# Altium PCB TPSM84824_PCB.PcbDoc
Units mm, origin at the board's own origin, x right, y up, seen from the top; angles counter-clockwise.
Board outline 22.2 x 28.4 mm, 2 copper layers (Top Layer, Bottom Layer); 11 components, 7 nets, 40 pads, 0 vias.
Unrouted connection lines stored in the file: 1.
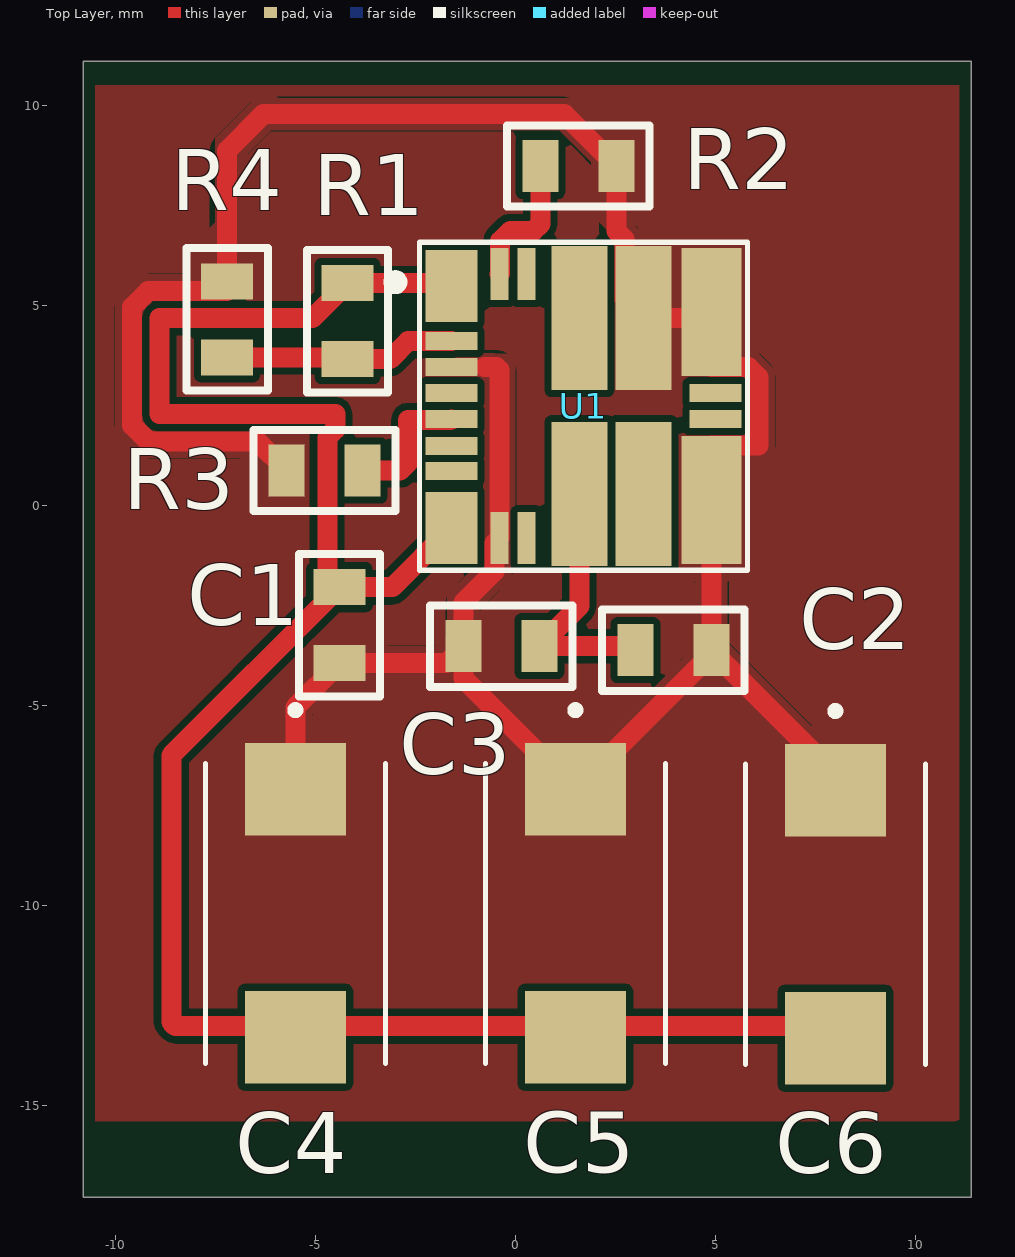
[diagram p0: Top Layer view]
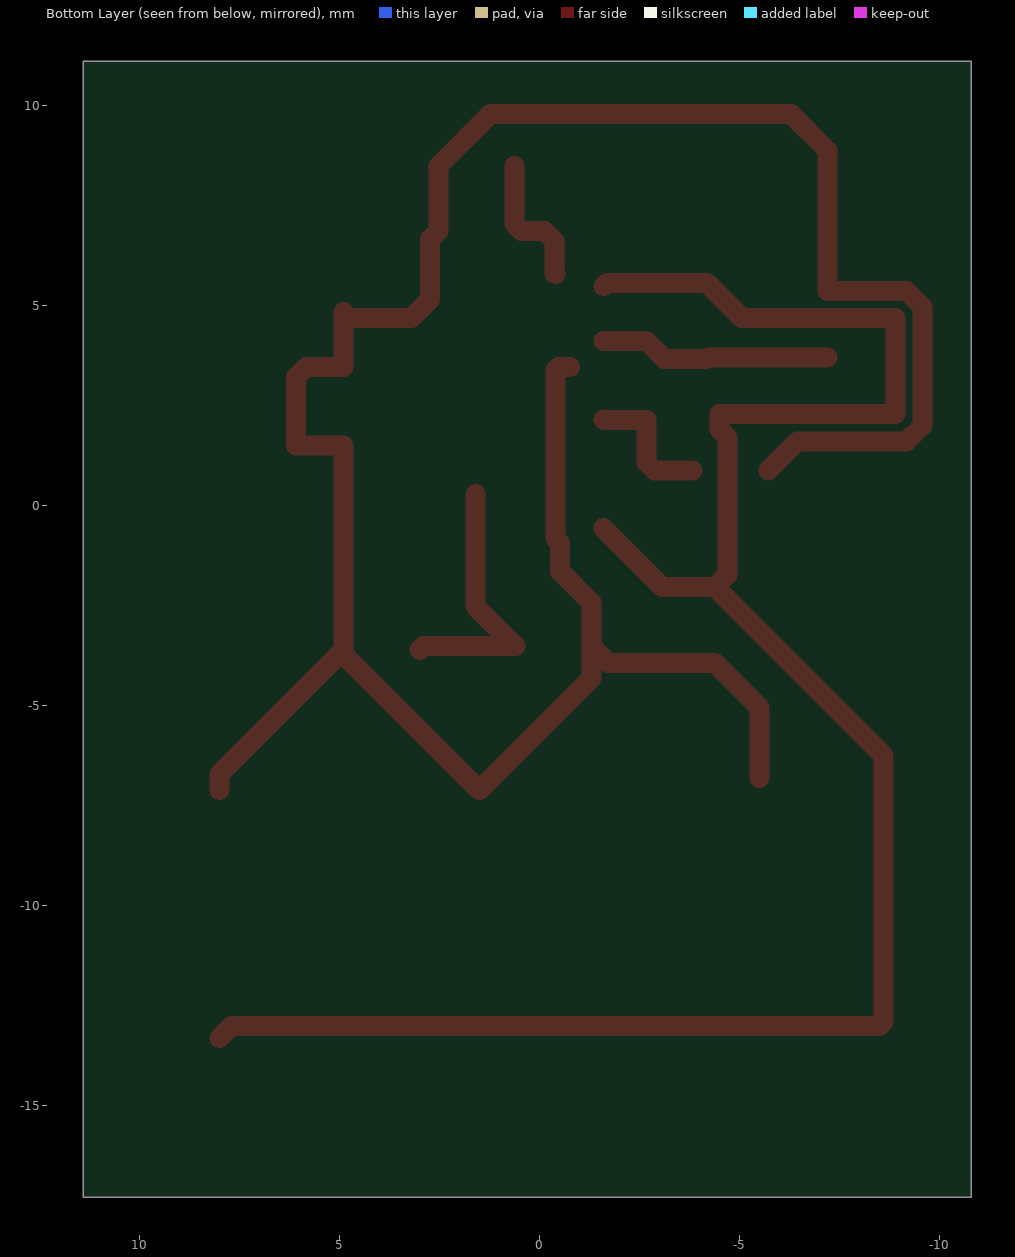
[diagram p1: Bottom Layer view, seen from below]
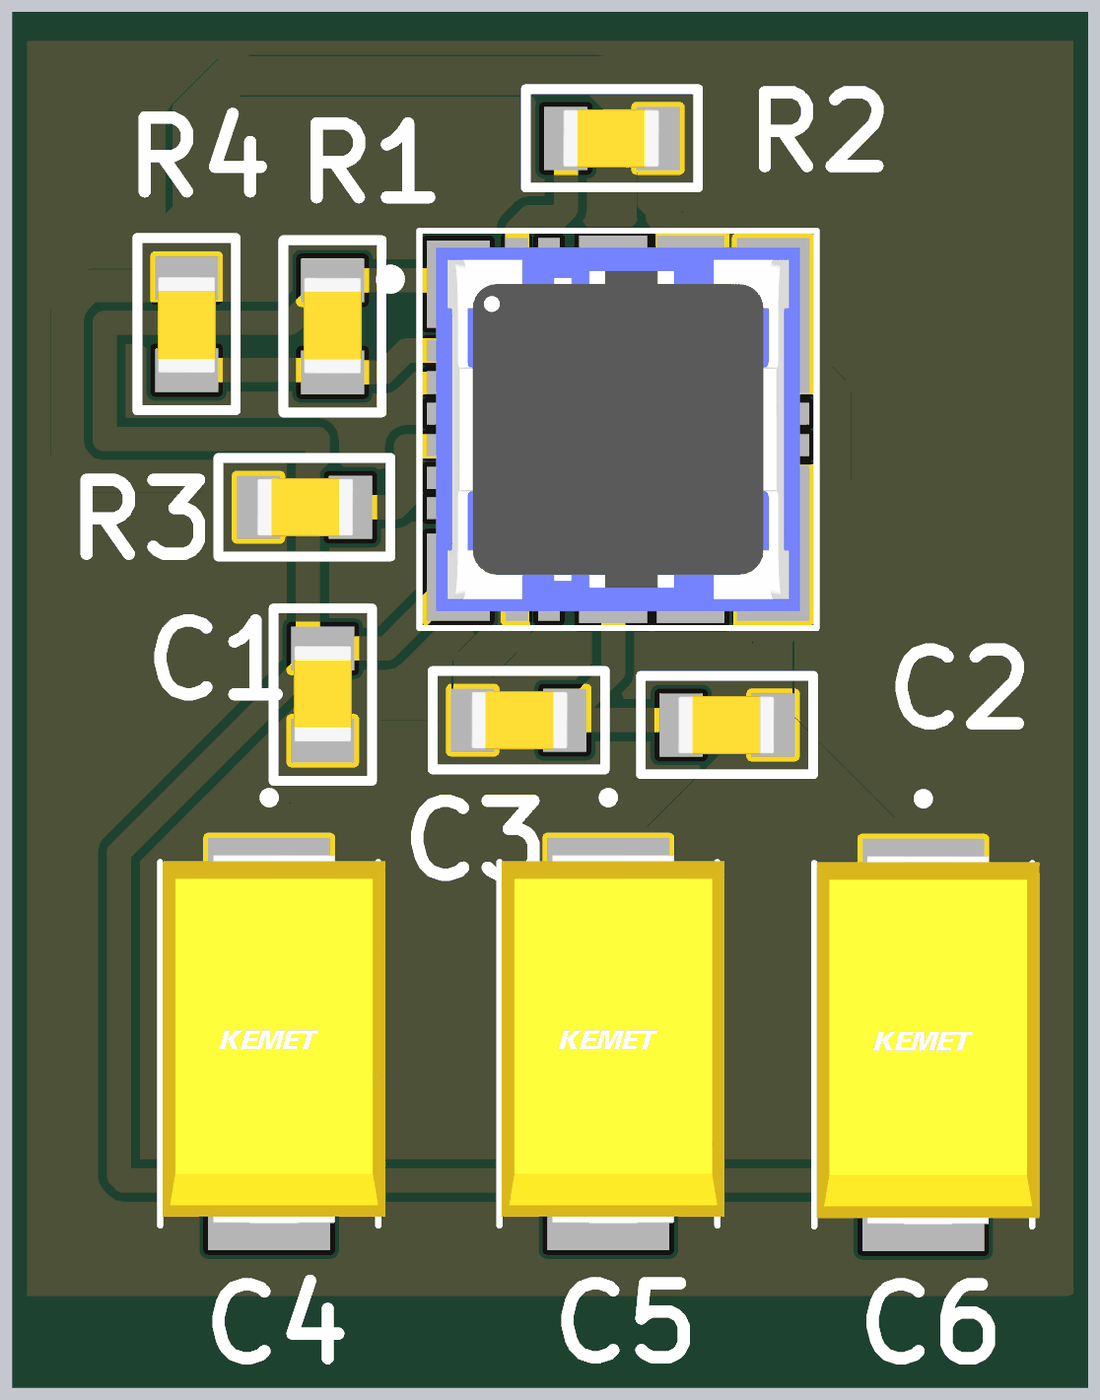
[diagram p2: 3D render of the assembled board from above, using the file's embedded part models]

## Layer stack, top to bottom
Top Solder: solder mask 0.0102, Solder Resist, Dk 3.5
Top Layer: signal copper 0.0356
Dielectric 1: dielectric 0.32, FR-4, Dk 4.8
Bottom Layer: signal copper 0.0356
Bottom Solder: solder mask 0.0102, Solder Resist, Dk 3.5

## Board outline
-10.8,11.1 11.4,11.1 11.4,-17.3 -10.8,-17.3

## Design rules (kind name [scope] priority, off if disabled: settings)
Clearance [All] p1: gap=0.178 ignorepadtopadclearanceinfootprint=FALSE
PolygonConnect PolygonConnect_1 [All] p1: connectstyle=Direct reliefconductorwidth=0.254 reliefentries=4 polygonreliefangle="90 Angle" airgapwidth=0.254
RoutingVias [All] p1: holewidth=0.711 width=1.27 viastyle="Through Hole" minholewidth=0.711 minwidth=1.27 maxholewidth=0.711 maxwidth=1.27
SolderMaskExpansion [All] p1: expansion=0.102
Width [All] p1: maxlimit=1 minlimit=0.254 preferedwidth=0.254
30 further rules are at their usual default settings.

## Components (designator, comment, footprint, x,y, rotation, side; value= is the part's Value field where it differs from the comment)
C1 "47µF" C/R0805 -4.4,-2.921 r90 top
C2 "10uF" C/R0805 3.877,-3.627 r180 top
C3 "10uF" C/R0805 -0.277,-3.515 r0 top
C4 "10uF_New" CAPPM7343X310N -5.5,-10.2 r270 top
C5 "10uF_New" CAPPM7343X310N 1.5,-10.2 r270 top
C6 "10uF_New" CAPPM7343X310N 8,-10.221 r270 top
R1 "10 kOhms" C/R0805 -4.2,4.679 r90 top
R2 "40.2kohm" C/R0805 1.5,8.479 r180 top
R3 "4.42kohm" C/R0805 -4.7,0.879 r0 top
R4 "1.37 kOhms" C/R0805 -7.2,4.579 r270 top
U1 "TPSM84824MOL" TPSM84424MOLR 1.7,2.479 r0 top

## Footprints (in the part's own frame and the unit in brackets; to place one, negate y for a bottom-side part, rotate by r counter-clockwise, add the part's x,y. Pads: shape width x height; smd on the part's side, far side on the other; paste and mask are expansions set on the pad)
C/R0805 [mm]
  rect 0.9x1.3 smd: 1(-1.023,-0.006) 2(0.877,-0.006)
  silkscreen extent -1.85,-1.02 1.71,1.01, body extent -1.06,-0.61 0.94,0.59, height 0.96
CAPPM7343X310N [mm]
  rect 2.31x2.52 smd: 1(-3.1,0) 2(3.1,0)
  silkscreen extent -5.18,-2.25 3.75,2.25, body extent -3.9,-2.2 3.7,2.4, height 3.11
TPSM84424MOLR [mm]
  rect 1.3x1.8 smd: 1(-3.3,3) 8(-3.3,-3.05)
  rect 1.3x0.45 smd: 2(-3.3,1.625) 3(-3.3,0.975) 4(-3.3,0.325) 5(-3.3,-0.325) 6(-3.3,-1) 7(-3.3,-1.625) 16(3.3,-0.325) 17(3.3,0.325)
  rect 0.45x1.3 smd: 9(-2.1,-3.3) 10(-1.425,-3.3) 23(-1.425,3.3) 24(-2.1,3.3)
  rect 1.4x3.6 smd: 11(-0.1,-2.2) 12(1.5,-2.2) 21(1.5,2.2) 22(-0.1,2.2)
  rect 1.5x3.2 smd: 13(3.2,-2.35) 20(3.2,2.35)
  silkscreen extent -4.85,-4.1 4.1,4.1, body extent -3.75,-3.75 3.75,3.75, height 5.4

## Part data
C1: library part GRM21BR60J476ME15K, "47μF 6.3V Ceramic Capacitor X5R 0805 (2012 Metric) 0.079\" L x 0.049\" W (2.00mm x 1.25mm)", Capacitance=47μF, Manufacturer=Murata, Operating Temperature="-55°C ~ 85°C", Package / Case="0805 (2012 Metric)", Ratings=-, Temperature Coefficient=X5R, Tolerance=±20%, Voltage - Rated=6.3V, Applications="General Purpose", Categories=Capacitors, ComponentLink1Description=http://www.mouser.com/ds/2/281/c02e-2905.pdf?src-supplier=Mouser, ComponentLink1URL=http://www.mouser.com/ds/2/281/c02e-2905.pdf?src-supplier=Mouser, ComponentLink2Description=https://search.murata.co.jp/Ceramy/image/img/A01X/G101/ENG/GRM21BR60J476ME15-01.pdf?src-supplier=Digi-Key, ComponentLink2URL=https://search.murata.co.jp/Ceramy/image/img/A01X/G101/ENG/GRM21BR60J476ME15-01.pdf?src-supplier=Digi-Key, Features=-, Height - Seated (Max)=-, Lead Spacing=-, Lead Style=-, Manufacturer Part Number=GRM21BR60J476ME15K, Mounting Type="Surface Mount, MLCC", Packaging="Tape & Reel (TR)", Part Status="Not For New Designs", Pricing 1="1=0.48, 10=0.339, 100=0.2236, 500=0.1656, 1000=0.1408, 2500=0.1325, 5000=0.1242 (USD)", Series=GRM, Size / Dimension="0.079 L x 0.049 W (2.00mm x 1.25mm)", Stock 1=16872, Supplier 1=Digi-Key, Thickness (Max)="0.057 (1.45mm)"
C2 C3: library part C0805C106K8PACTU, "CAP CER 10UF 10V X5R 0805", Capacitance Value="10 uF", Dielectric=X5R, Manufacturer=KEMET, Operating Temperature="-55 to 85 °C", Package/Case=0805, Tolerance="10 %", Voltage="10 Vdc", Category="Capacitor Ceramic Multilayer", ComponentLink1Description=http://www.farnell.com/datasheets/2739827.pdf?src-supplier=Element14, ComponentLink1URL=http://www.farnell.com/datasheets/2739827.pdf?src-supplier=Element14, ComponentLink2Description=http://www.farnell.com/datasheets/40889.pdf?src-supplier=Element14, ComponentLink2URL=http://www.farnell.com/datasheets/40889.pdf?src-supplier=Element14, Construction=Flat, Manufacturer Part Number=C0805C106K8PACTU, Mounting="Surface Mount", Pricing 1="1=0.16, 10=0.117, 100=0.055, 500=0.0386, 1000=0.0319 (USD)", Product Height="1.25 mm", Product Length="2 mm", Stock 1=872414, Supplier 1=Digi-Key
C4 C5 C6: library part T495D106M035ATE125, "CAP TANT 10UF 35V 20% 2917", Capacitance=10μF, Capacitance Tolerance="± 20%", Capacitor Case Style="2917 ^7343 Metric]", Manufacturer=KEMET, Operating Temperature Max=125°C, Operating Temperature Min=-55°C, Voltage Rating=35V, ComponentLink1Description=https://www.verical.com/server-webapp/html/getDatasheet?partID=44813&src-supplier=Verical, ComponentLink1URL=https://www.verical.com/server-webapp/html/getDatasheet?partID=44813&src-supplier=Verical, ComponentLink2Description=http://www.farnell.com/datasheets/1761160.pdf?src-supplier=Element14, ComponentLink2URL=http://www.farnell.com/datasheets/1761160.pdf?src-supplier=Element14, ComponentLink3Description=http://www.farnell.com/datasheets/1744560.pdf?src-supplier=Element14, ComponentLink3URL=http://www.farnell.com/datasheets/1744560.pdf?src-supplier=Element14, ESR=0.125ohm, Manufacturer Part Number=T495D106M035ATE125, Packaging="Full Reel", Pricing 1="1=1.79, 10=1.449, 100=1.1066 (USD)", Product Range="KEMET - T495 Series", Stock 1=5675, Supplier 1=Digi-Key
R1: library part RC0805FR-0710KL, "RES SMD 10K OHM 1% 1/8W 0805", Case Code - in=0805, Case Code - mm=2012, Manufacturer=Yageo, Operating Temperature Range="- 55 C to + 155 C", Power Rating="125 mW (1/8 W)", Temperature Coefficient="100 PPM / C", Tolerance="1 %", Voltage Rating="150 V", ComponentLink1Description=http://www.yageo.com/documents/recent/PYu-RC_Group_51_RoHS_L_9.pdf?src-supplier=Mouser, ComponentLink1URL=http://www.yageo.com/documents/recent/PYu-RC_Group_51_RoHS_L_9.pdf?src-supplier=Mouser, ComponentLink2Description=http://www.farnell.com/datasheets/2167052.pdf?src-supplier=Element14, ComponentLink2URL=http://www.farnell.com/datasheets/2167052.pdf?src-supplier=Element14, ComponentLink3Description=http://www.yageo.com/documents/recent/PYu-RC_Group_51_RoHS_L_10.pdf?src-supplier=Digi-Key, ComponentLink3URL=http://www.yageo.com/documents/recent/PYu-RC_Group_51_RoHS_L_10.pdf?src-supplier=Digi-Key, ComponentLink4Description=http://www.yageo.ru/pdf/RC0805.pdf?src-supplier=Future+Electronics, ComponentLink4URL=http://www.yageo.ru/pdf/RC0805.pdf?src-supplier=Future+Electronics, Manufacturer Part Number=RC0805FR-0710KL, Packaging=Reel, Pricing 1="1=0.1, 10=0.036, 100=0.0147, 1000=0.0066, 2500=0.0057 (USD)", Product="Thick Film Resistors General Purpose", Resistance="10 kOhms", Series=RC, Stock 1=37419702, Supplier 1=Digi-Key, Termination Style=SMD/SMT
R2: library part ERA-6AEB4022V, "Res Thin Film 0805 40.2K Ohm 0.1% 1/8W 25ppm/C Molded SMD SMD Punched Carrier T/R", Manufacturer=Panasonic, Operating Temperature Max=155°C, Operating Temperature Min=-55°C, Operating Temperature Range="-55°C to +155°C", Power Rating=125mW, Resistance Tolerance="± 0.1%", Resistor Case Style="0805 [2012 Metric]", Resistor Element Material="Thin Film", Resistor Mounting=SMD, Temperature Coefficient="± 25ppm/°C", Voltage Rating=100V, ComponentLink1Description=http://uk.rs-online.com/webdocs/0eb1/0900766b80eb1d8c.pdf?src-supplier=RSComponents, ComponentLink1URL=http://uk.rs-online.com/webdocs/0eb1/0900766b80eb1d8c.pdf?src-supplier=RSComponents, ComponentLink2Description=http://industrial.panasonic.com/www-data/pdf/AOA0000/AOA0000CE26.pdf?src-supplier=Avnet+Europe, ComponentLink2URL=http://industrial.panasonic.com/www-data/pdf/AOA0000/AOA0000CE26.pdf?src-supplier=Avnet+Europe, ComponentLink3Description=http://www.farnell.com/datasheets/485442.pdf?src-supplier=Farnell, ComponentLink3URL=http://www.farnell.com/datasheets/485442.pdf?src-supplier=Farnell, ComponentLink4Description=http://www.farnell.com/datasheets/485442.pdf?src-supplier=Element14, ComponentLink4URL=http://www.farnell.com/datasheets/485442.pdf?src-supplier=Element14, ComponentLink5Description=http://www.mouser.com/ds/2/315/AOA0000CE26-32660.pdf?src-supplier=Mouser, ComponentLink5URL=http://www.mouser.com/ds/2/315/AOA0000CE26-32660.pdf?src-supplier=Mouser, ComponentLink6Description=http://industrial.panasonic.com/www-data/pdf/AOA0000/AOA0000CE26.pdf?src-supplier=Avnet, ComponentLink6URL=http://industrial.panasonic.com/www-data/pdf/AOA0000/AOA0000CE26.pdf?src-supplier=Avnet, ComponentLink7Description=https://produktinfo.conrad.com/datenblaetter/450000-474999/458496-da-01-en-WIDERSTAND_0805_ERA.pdf?src-supplier=Conrad, ComponentLink7URL=https://produktinfo.conrad.com/datenblaetter/450000-474999/458496-da-01-en-WIDERSTAND_0805_ERA.pdf?src-supplier=Conrad, External Depth=1.25mm, External Length / Height=0.5mm, External Width=2mm, Manufacturer Part Number=ERA-6AEB4022V, No. of Pins=2, Packaging=Reel, Pricing 1="1=0.36, 10=0.302, 100=0.1182, 1000=0.0495, 2500=0.0454 (USD)", Product Range="PANASONIC - ERA Series Metal Film Chip Resistor", Resistance=40.2kohm, Series=ERA, Stock 1=45354, Supplier 1=Digi-Key
R3: library part ERA-6AEB4421V, "Panasonic ERA Series Thin Film Surface Mount Fixed Resistor 0805 Case 4.42k 0.1% 0.125W 25ppm/C", Manufacturer=Panasonic, Operating Temperature Max=155°C, Operating Temperature Min=-55°C, Operating Temperature Range="-55°C to +155°C", Power Rating=125mW, Resistance Tolerance="± 0.1%", Resistor Case Style="0805 [2012 Metric]", Resistor Element Material="Thin Film", Resistor Mounting=SMD, Temperature Coefficient="± 25ppm/°C", Voltage Rating=100V, ComponentLink1Description=http://uk.rs-online.com/webdocs/0eb1/0900766b80eb1d8c.pdf?src-supplier=RSComponents, ComponentLink1URL=http://uk.rs-online.com/webdocs/0eb1/0900766b80eb1d8c.pdf?src-supplier=RSComponents, ComponentLink2Description=http://www.farnell.com/datasheets/485442.pdf?src-supplier=Farnell, ComponentLink2URL=http://www.farnell.com/datasheets/485442.pdf?src-supplier=Farnell, ComponentLink3Description=http://www.farnell.com/datasheets/485442.pdf?src-supplier=Element14, ComponentLink3URL=http://www.farnell.com/datasheets/485442.pdf?src-supplier=Element14, ComponentLink4Description=http://industrial.panasonic.com/www-data/pdf/AOA0000/AOA0000CE26.pdf?src-supplier=Avnet, ComponentLink4URL=http://industrial.panasonic.com/www-data/pdf/AOA0000/AOA0000CE26.pdf?src-supplier=Avnet, ComponentLink5Description=http://www.produktinfo.conrad.com/datenblaetter/1100000-1199999/001181285-da-01-en-WIDERSTAND_ERA_0805_4K42_0_1__5000ST.pdf?src-supplier=Conrad, ComponentLink5URL=http://www.produktinfo.conrad.com/datenblaetter/1100000-1199999/001181285-da-01-en-WIDERSTAND_ERA_0805_4K42_0_1__5000ST.pdf?src-supplier=Conrad, External Depth=1.25mm, External Length / Height=0.5mm, External Width=2mm, Manufacturer Part Number=ERA-6AEB4421V, No. of Pins=2, Packaging=Reel, Pricing 1="1=0.36, 10=0.302, 100=0.1182, 1000=0.0495, 2500=0.0454 (USD)", Product Range="PANASONIC - ERA", Resistance=4.42kohm, Series=ERA, Stock 1=10445, Supplier 1=Digi-Key
R4: library part RC0805FR-071K37L, "RES SMD 1.37K OHM 1% 1/16W 0402", Case Code - in=0402, Case Code - mm=1005, Manufacturer=Vishay, Manufacturer Part Number=CRCW04021K37FKED, Operating Temperature Range="- 55 C to + 155 C", Package / Case="0402 (1005 metric)", Power Rating="63 mW", Temperature Coefficient="100 PPM / K", Tolerance="1 %", Voltage Rating="50 V", Brand="Vishay / Dale", ComponentLink1Description=http://www.vishay.com/docs/20035/dcrcwe3.pdf?src-supplier=Digi-Key, ComponentLink1URL=http://www.vishay.com/docs/20035/dcrcwe3.pdf?src-supplier=Digi-Key, ComponentLink2Description=http://www.vishay.com/docs/20035/dcrcwe3.pdf?src-supplier=Avnet, ComponentLink2URL=http://www.vishay.com/docs/20035/dcrcwe3.pdf?src-supplier=Avnet, ComponentLink3Description=http://www.farnell.com/datasheets/1697337.pdf?src-supplier=Element14, ComponentLink3URL=http://www.farnell.com/datasheets/1697337.pdf?src-supplier=Element14, ComponentLink4Description=http://www.farnell.com/datasheets/2310790.pdf?src-supplier=Farnell, ComponentLink4URL=http://www.farnell.com/datasheets/2310790.pdf?src-supplier=Farnell, ComponentLink5Description=http://www.mouser.com/ds/2/427/dcrcwe3-109170.pdf?src-supplier=Mouser, ComponentLink5URL=http://www.mouser.com/ds/2/427/dcrcwe3-109170.pdf?src-supplier=Mouser, ComponentLink6Description=http://www.farnell.com/datasheets/2111203.pdf?src-supplier=Element14, ComponentLink6URL=http://www.farnell.com/datasheets/2111203.pdf?src-supplier=Element14, ComponentLink7Description=http://www.vishay.com/docs/20035/dcrcwe3.pdf?src-supplier=Future+Electronics, ComponentLink7URL=http://www.vishay.com/docs/20035/dcrcwe3.pdf?src-supplier=Future+Electronics, ComponentLink8Description=http://www.farnell.com/datasheets/2045674.pdf?src-supplier=Element14, ComponentLink8URL=http://www.farnell.com/datasheets/2045674.pdf?src-supplier=Element14, ComponentLink9Description=https://www.alliedelec.com/m/d/0c934d6939ccefa68dbe0b96d821c8cf.pdf?src-supplier=Allied+Electronics, ComponentLink9URL=https://www.alliedelec.com/m/d/0c934d6939ccefa68dbe0b96d821c8cf.pdf?src-supplier=Allied+Electronics, Factory Pack Quantity=10000, Height="0.35 mm", Length="1 mm", Packaging=Reel, Pricing 1="1=0.1, 10=0.038, 100=0.0154, 1000=0.0069, 2500=0.006, 5000=0.005 (USD)", Product="Thick Film Resistors SMD", Product Category="Thick Film Resistors - SMD", Resistance="1.37 kOhms", RoHS=Details, Series=CRCW, Stock 1=47266, Supplier 1=Digi-Key, Termination Style=SMD/SMT, Unit Weight="0.000023 oz", Width="0.5 mm"
U1: "DC DC CONVERTER 0.6-10V", Current - Output (Max)=8A, Manufacturer="Texas Instruments", Manufacturer Part Number=TPSM84824MOLR, Operating Temperature="-40°C ~ 105°C", Package / Case="24-SMD Module", Supplier Device Package="24-QFM (7.5x7.5)", Voltage - Input (Max)=17V, Voltage - Input (Min)=4.5V, Voltage - Output 1="0.6 ~ 10 V", Voltage - Output 2=-, Applications="ITE (Commercial)", Categories="Power Supplies - Board Mount", ComponentLink1Description=http://www.ti.com/lit/ds/symlink/tpsm84824.pdf?src-supplier=Digi-Key, ComponentLink1URL=http://www.ti.com/lit/ds/symlink/tpsm84824.pdf?src-supplier=Digi-Key, Efficiency=94%, Features="OCP, OTP, UVLO", Mounting Type="Surface Mount", Number of Outputs=1, Packaging="Cut Tape (CT)", Part Status=Active, Pricing 1="1=11.33, 10=10.409, 100=8.3593 (USD)", Series=-, Size / Dimension="0.30 L x 0.30 W x 0.21 H (7.5mm x 7.5mm x 5.4mm)", Stock 1=469, Supplier 1=Digi-Key, Type="Non-Isolated PoL Module", Voltage - Output 3=-, Voltage - Output 4=-

## Nets (pads, with @x,y where several pads share a name; then routed paths per layer and width w, separated by ;. In a path a pad name is that pad's centre, name@x,y a point inside that pad or via, vN(x,y) a via of type N, cw(c..) or ccw(c..) an arc to the next point about the centre after c; other vN are vias at no path point)
GND: C1.1 C2.1 C3.1 C4.1 C5.1 C6.1 R2.1 R3.1 R4.1 U1.3 U1.9 U1.13 U1.20 U1.21 | length 69.2
  Top Layer w0.5: R3.1 -6.451,1.601 -9.181,1.601 -9.578,1.998 -9.578,4.959 -9.181,5.356 -7.206,5.356 R4.1 -7.206,8.873 -6.3,9.779 1.229,9.779 R2.1 2.523,6.861 2.728,6.656 2.728,5.151 U1.21 4.75,4.679 U1.20 4.9,3.456 5.827,3.456 6.078,3.206 6.078,1.501 4.9,1.501 U1.13 C2.1 ; C4.1@-5.5,-6.821 -5.5,-5.05 C1.1 -1.723,-3.944 C3.1 ; -0.77,3.454 -0.475,3.454 -0.4,3.379 U1.9 -0.522,-0.944 -0.522,-1.649 -1.3,-2.426 C3.1 ; C6.1 8,-6.721 C2.1 ; C3.1 -1.3,-4.321 1.5,-7.121 4.9,-3.721 C2.1
NetR1_1: R1.1 R4.2 U1.2 | length 5.8
  Top Layer w0.5: R4.2 -4.24,3.702 R1.1 -3.129,3.656 -2.678,4.106 U1.2@-1.6,4.106
NetR2_2: R2.2 U1.24 | length 3.5
  Top Layer w0.5: U1.24 -0.378,5.801 -0.378,6.606 -0.127,6.856 0.448,6.856 0.623,7.031 R2.2
NetR3_2: R3.2 U1.5 | length 3.4
  Top Layer w0.5: R3.2 -2.878,0.873 -2.678,1.073 -2.678,2.131 -1.619,2.131 U1.5@-1.6,2.151
NetU1_16: U1.16 U1.17
Vin: C2.2 C3.2 U1.11 | length 6.7
  Top Layer w0.5: U1.11 1.6,-2.521 C3.2 2.9,-3.521 C2.2
Vout: C1.2 C4.2 C5.2 C6.2 R1.2 U1.1 U1.8 | length 51.8
  Top Layer w0.5: U1.8 -3.073,-2.044 C1.2 ; U1.1 -1.677,5.556 R1.2 -5.071,4.679 -8.9,4.679 -8.9,2.279 -4.5,2.279 -4.5,1.901 -4.701,1.7 -4.701,-1.738 C1.2 ; C6.2 7.7,-13.021 -8.5,-13.021 -8.6,-12.921 -8.6,-6.25 C1.2
pads on no net: U1.4 U1.6 U1.7 U1.10 U1.12 U1.22 U1.23

## Polygon pours and split planes (outlines as drawn)
GND on Top Layer "GND" (solid, pour order 8): -10,1.779 -10,5.379 -9.6,5.779 -8.1,5.779 -8.1,6.479 -7.5,7.079 -7.5,9.179 -7.2,9.479 -6.3,10.379 -5.9,10.179 2.1,10.179 3.6,8.979 3.6,7.579 3,6.979 3.4,6.579 6,6.579 6,3.879 6.5,3.379 6.5,1.179 6,0.679 6,-2.121 5.7,-2.121 5.4,-1.821 5.3,-1.921 5.3,-3.421 7.4,-5.521 9.2,-5.521 9.5,-5.821 9.5,-8.521 6.7,-8.521 6.4,-8.221 6.4,-5.821 5.1,-4.521 4.9,-4.721 4.6,-4.721 3.1,-6.221 3.1,-8.621 0,-8.621 0,-6.421 -1.8,-4.621 -1.8,-4.521 -4.1,-4.521 -4.8,-5.221 -5.1,-5.221 -4.7,-5.621 -3.8,-5.621 -3.8,-8.121 -4.2,-8.121 -7,-8.121 -7,-5.521 -6.6,-5.121 -6,-5.121 -6,-4.921 -5.2,-4.121 -5.2,-3.321 -3.3,-3.321 -3.2,-3.421 -3.2,-3.521 -2,-3.521 -1.7,-3.221 -1.7,-2.121 -1.6,-2.121 -0.8,-1.321 -0.8,2.979 -1,3.179 -2.5,3.179 -2.5,3.479 -2.5,3.879 0,3.779 0,-0.321 -0.1,-0.421 -0.1,-2.121 -0.4,-2.121 -0.9,-2.621 -0.7,-2.821 -0.7,-4.221 0.8,-5.721 2.3,-5.721 4.2,-3.821 4.2,-2.221 4.5,-1.921 4.2,-1.621 4.1,-1.621 4.1,2.079 3.7,2.479 3.7,2.779 2.5,2.779 2.4,2.679 2.4,6.779 2.1,7.079 2.1,7.779 1.8,7.779 1.9,7.879 1.9,8.579 1.1,9.379 -6.1,9.379 -6.7,8.779 -6.7,6.579 -6.3,6.179 -6.3,5.179 -9,5.179 -9.2,4.979 -9.2,1.879 -5.2,1.879 -5.2,0.079 -6.4,0.079 -6.4,0.679 -6.9,1.179 -9.4,1.179
GND on Top Layer "GND" (solid, pour order 12): -10.5,10.5 11.1,10.5 11.1,-15.5 11,-15.4 -10.5,-15.4